# EAGLE board SubboardWithoutMotorsAndEM (EAGLE 9.6.0)
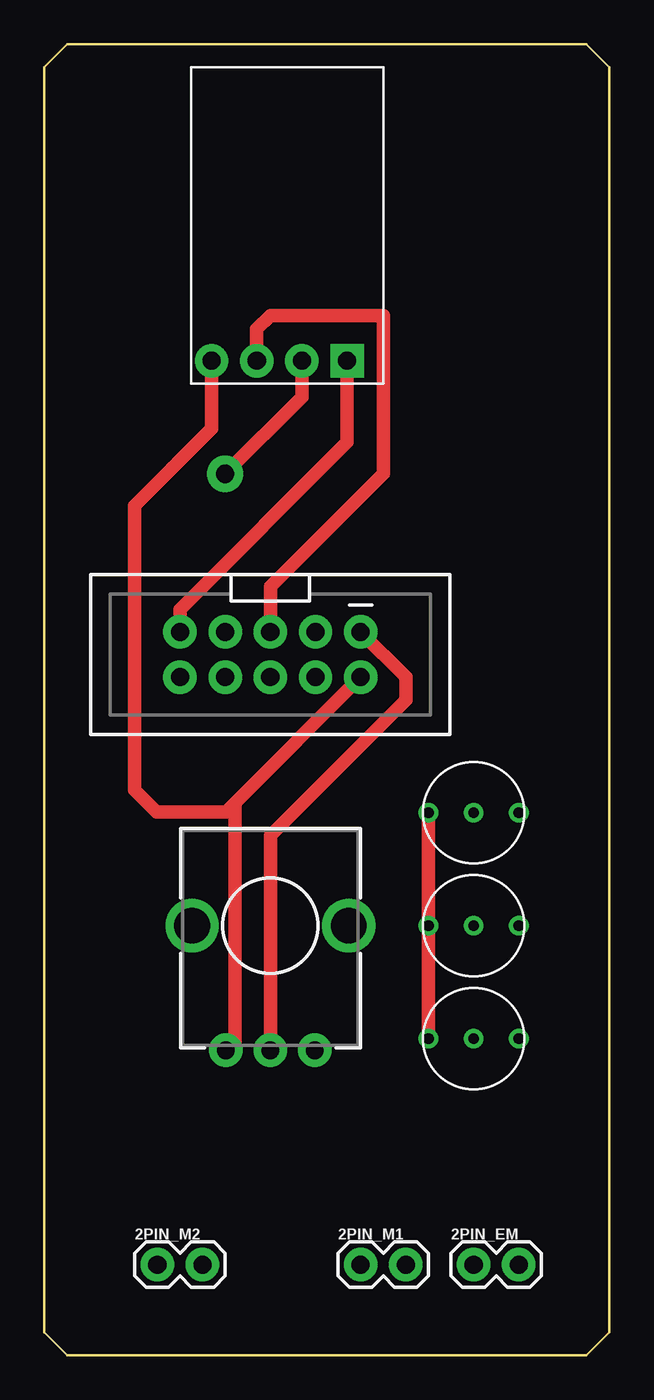
[diagram p0: board, top side]
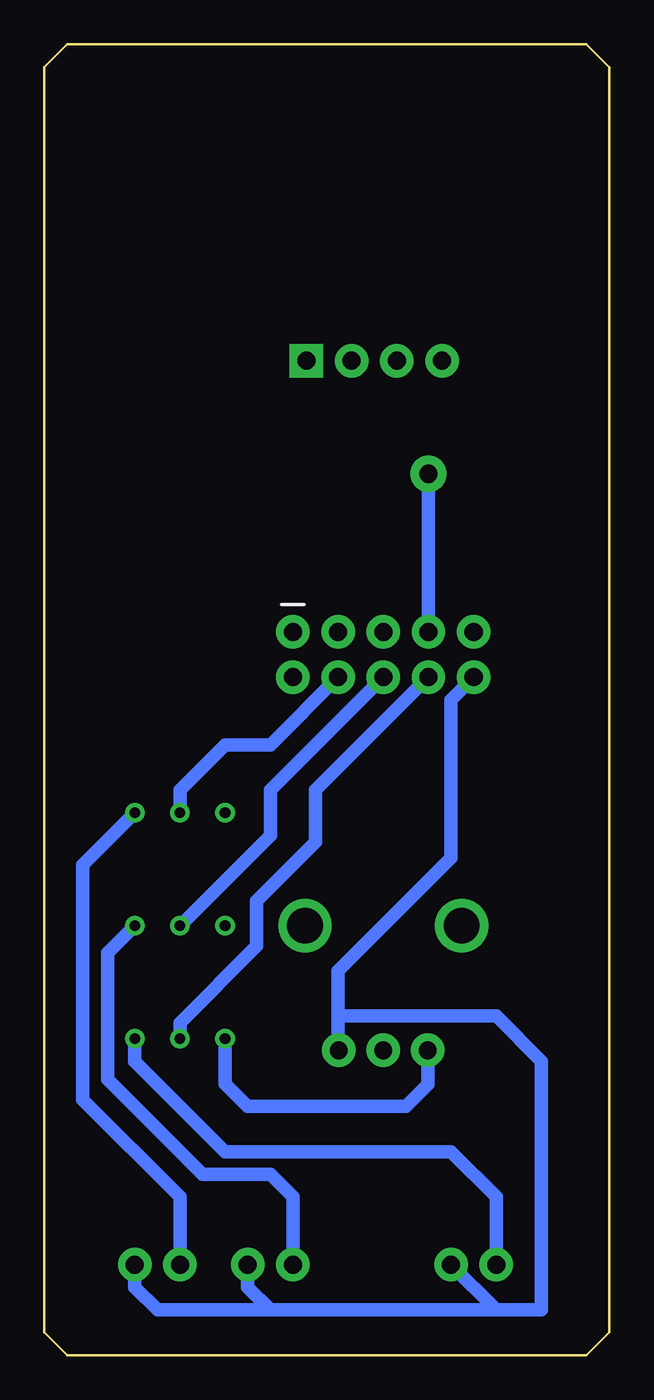
[diagram p1: board, bottom side, seen from below]

Size 31.75 x 73.66 mm. Coordinates in mm from the lower left corner, seen from the top.
Outline: 1.27,0 30.48,0 31.75,1.27 31.75,72.39 30.48,73.66 1.27,73.66 0,72.39 0,1.27 1.27,0
Copper layers (1*16): Top 0.035mm / dielectric 1.5mm / Bottom 0.035mm
Design rules "default": minimum track width 6mil, minimum drill 0.35mm, track to track 6mil, track to pad 6mil, pad to pad 6mil, via to via 6mil, smd to smd 6mil, copper to edge 40mil, drill to drill 6mil, minimum pad ring 10mil, minimum via ring 8mil, stop-mask expansion 4mil, vias tented up to drill 0mil, thermal gap 10mil

## Footprints (pad centres in the part's own frame; a part is rotated, then mirrored left to right if it is on the bottom)
1X02 = drill 1.016 pad 1.88: 1 0,0; 2 2.54,0
POT-PTH-ALPS-KIT = drill 1 pad 1.88: P$1 7,-2.5; P$2 7,0; P$3 7,2.5 | drill 2: P$4 0,-4.4; P$5 0,4.4
2N7000_N_FET = drill 0.6: D 2.54,0; G 0,0; S -2.54,0
2X5-SHROUDED = drill 1.016 pad 1.88: 1 -1.27,5.08; 2 1.27,5.08; 3 -1.27,2.54; 4 1.27,2.54; 5 -1.27,0; 6 1.27,0; 7 -1.27,-2.54; 8 1.27,-2.54; 9 -1.27,-5.08; 10 1.27,-5.08
MPU-9250 = drill 1.016 pad 1.88 square: 1 2.032,-1.27 | drill 1.016 pad 1.88: 2 4.572,-1.27; 3 7.112,-1.27; 4 9.652,-1.27

## Placement (x,y rotation side)
2PIN_EM  [1X02]  24.13,5.08 0 top
2PIN_M1  [1X02]  17.78,5.08 0 top
2PIN_M2  [1X02]  6.35,5.08 0 top
ANGLE_POT  10k  [POT-PTH-ALPS-KIT]  12.7,24.13 270 top
ELECTRO_2N7000  2N7000_N_FET  [2N7000_N_FET]  24.13,30.48 0 top
J1  [2X5-SHROUDED]  12.7,39.37 270 top
M1_2N7000  2N7000_N_FET  [2N7000_N_FET]  24.13,24.13 0 top
M2_2N7000  2N7000_N_FET  [2N7000_N_FET]  24.13,17.78 0 top
U$1  MPU-9250  [MPU-9250]  19.05,54.61 180 top

## Library data of the parts
2PIN_EM 2PIN_M1 2PIN_M2 = SparkFun-Connectors
ANGLE_POT = SparkFun-Resistors; PROD_ID: RES-09177; SF_SKU: COM-09288
ELECTRO_2N7000 M1_2N7000 M2_2N7000 U$1 = ChopstixComponents
J1 = SparkFun-Connectors; PROD_ID: CONN-08671; SF_ID: PRT-08506

## Nets
3.3V: J1.5 U$1.3
5V: 2PIN_EM.2 2PIN_M1.2 2PIN_M2.2 ANGLE_POT.P$3 J1.10
A2: ANGLE_POT.P$2 J1.1
A4: J1.7 U$1.2
A5: J1.9 U$1.1
D3: J1.6 M1_2N7000.G
D5: J1.8 M2_2N7000.G
D6: ELECTRO_2N7000.G J1.4
GND: ANGLE_POT.P$1 ELECTRO_2N7000.S J1.2 M1_2N7000.S M2_2N7000.S U$1.4
N$1: 2PIN_M2.1 M2_2N7000.D
N$2: 2PIN_M1.1 M1_2N7000.D
N$3: 2PIN_EM.1 ELECTRO_2N7000.D

## Tracks (layer width: path | path; a pad name or v marks a point on that pad's centre or on a via)
3.3V
  Top 0.762: J1.5 12.7,43.18 19.05,49.53 19.05,58.42 12.7,58.42 11.94,57.66 U$1.3
5V
  Bottom 0.762: 15.24,19.05 15.24,21.59 8.89,27.94 8.89,36.83 J1.10 | 15.24,19.05 15.24,17.17 ANGLE_POT.P$3 | 2PIN_M2.2 6.35,2.54 | 6.35,2.54 3.81,2.54 3.81,16.51 6.35,19.05 15.24,19.05 | 6.35,2.54 19.05,2.54 | 19.05,2.54 25.4,2.54 26.67,3.81 2PIN_EM.2 | 2PIN_M1.2 20.32,3.81 19.05,2.54
A2
  Top 0.762: ANGLE_POT.P$2 12.7,29.21 20.32,36.83 20.32,38.1 J1.1
A4  (via drill 1.02 pad 2.03)
  Top 0.762: U$1.2 14.48,53.85 v10.16,49.53
  Bottom 0.762: J1.7 v10.16,49.53
A5
  Top 0.762: U$1.1 17.02,51.31 7.62,41.91 J1.9
D3
  Bottom 0.762: J1.6 19.05,31.75 19.05,29.21 M1_2N7000.G
D5
  Bottom 0.762: J1.8 16.51,31.75 16.51,28.83 19.81,25.53 19.81,22.99 24.13,18.67 M2_2N7000.G
D6
  Bottom 0.762: J1.4 19.05,34.29 21.59,34.29 24.13,31.75 ELECTRO_2N7000.G
GND
  Top 0.762: 10.71,31.03 10.71,17.64 ANGLE_POT.P$1 | 10.71,31.03 10.2,30.52 6.31,30.52 5.08,31.75 5.08,47.75 9.4,52.07 U$1.4 | 10.71,31.03 J1.2 | ELECTRO_2N7000.S M1_2N7000.S M2_2N7000.S
  Bottom 0.762: ANGLE_POT.P$1 10.2,15.2 11.43,13.97 20.32,13.97 21.59,15.24 M2_2N7000.S
N$1
  Bottom 0.762: 2PIN_M2.1 6.35,8.89 8.89,11.43 21.59,11.43 26.67,16.51 M2_2N7000.D
N$2
  Bottom 0.762: 2PIN_M1.1 17.78,8.89 19.05,10.16 22.86,10.16 28.19,15.49 28.19,22.61 M1_2N7000.D
N$3
  Bottom 0.762: 2PIN_EM.1 24.13,8.89 29.59,14.35 29.59,27.56 ELECTRO_2N7000.D